# EAGLE board rizon-bckp (EAGLE 8.4.0)
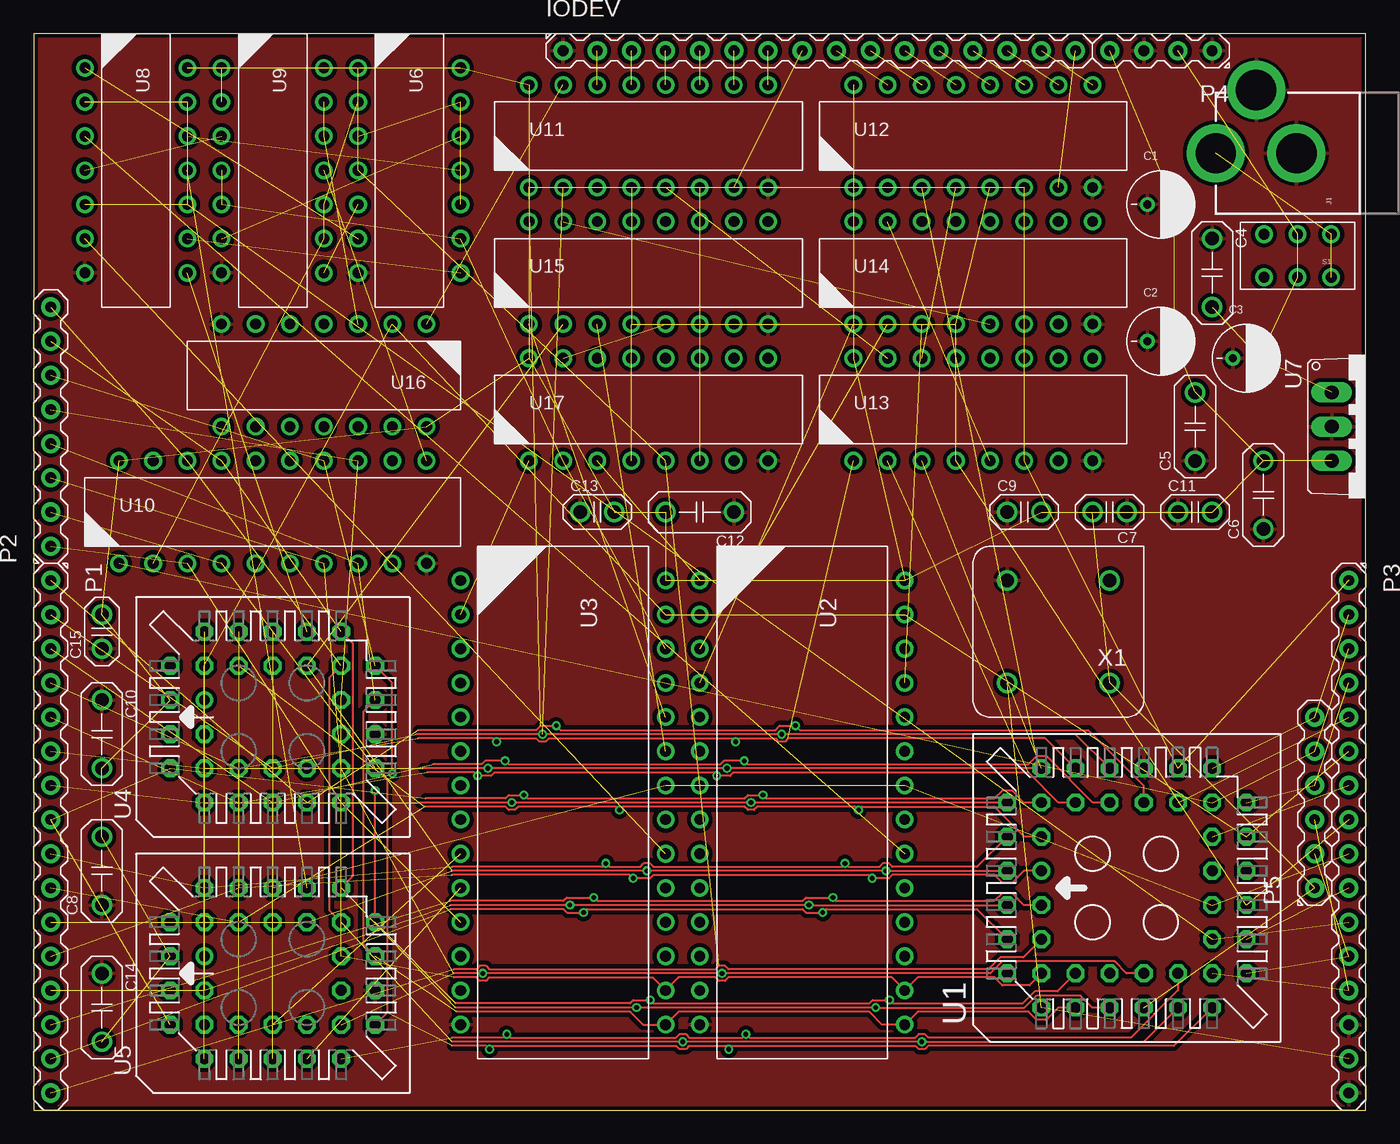
[diagram p0: board, top side]
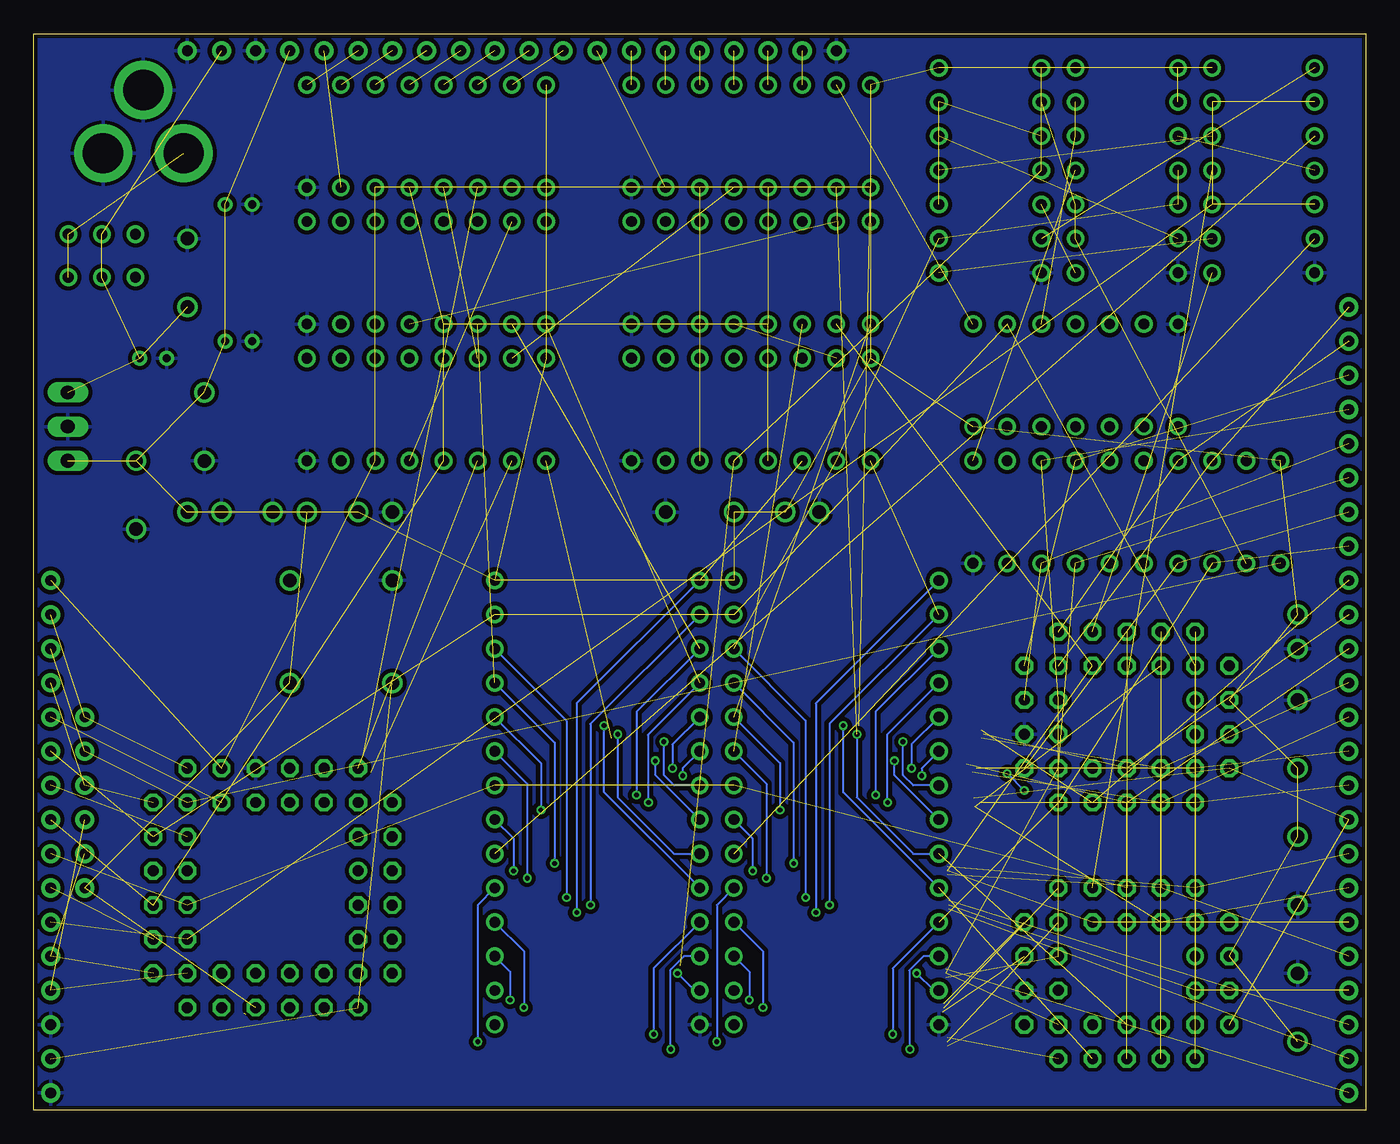
[diagram p1: board, bottom side, seen from below]

Size 99.06 x 80.01 mm. Coordinates in mm from the lower left corner, seen from the top.
Outline: 0,0 99.06,0 99.06,80.01 0,80.01 0,0
Copper layers (1*16): Top 0.035mm / dielectric 1.5mm / Bottom 0.035mm
Design rules "dooba": minimum track width 6mil, minimum drill 12mil, track to track 6mil, track to pad 6mil, pad to pad 6mil, via to via 6mil, smd to smd 0mil, copper to edge 10mil, drill to drill 10mil, minimum pad ring 10mil, minimum via ring 6mil, stop-mask expansion 2mil, vias tented up to drill 25mil, thermal gap 10mil

## Footprints (pad centres in the part's own frame; a part is rotated, then mirrored left to right if it is on the bottom)
PIN_16 = drill 0.8 pad 1.422: 1 -19.05,0; 2 -16.51,0; 3 -13.97,0; 4 -11.43,0; 5 -8.89,0; 6 -6.35,0; 7 -3.81,0; 8 -1.27,0; 9 1.27,0; 10 3.81,0; 11 6.35,0; 12 8.89,0; 13 11.43,0; 14 13.97,0; 15 16.51,0; 16 19.05,0
RADCAP_5MM = drill 0.6: + 1,0; - -1,0
CAP_508 = drill 1: P$1 -2.54,0; P$2 2.54,0
CAP_DISC = drill 1: P$1 -1.27,0; P$2 1.27,0
PWRJACK_5521 = drill 2.997 pad 4.318: GND 0,0.08; GNDBREAK 4.7,3.08; PWR 0,6.08
PIN_8 = drill 0.8 pad 1.422: 1 -8.89,0; 2 -6.35,0; 3 -3.81,0; 4 -1.27,0; 5 1.27,0; 6 3.81,0; 7 6.35,0; 8 8.89,0
PIN_4 = drill 0.8 pad 1.422: 1 -3.81,0; 2 -1.27,0; 3 1.27,0; 4 3.81,0
PIN_6 = drill 0.8 pad 1.422: 1 -6.35,0; 2 -3.81,0; 3 -1.27,0; 4 1.27,0; 5 3.81,0; 6 6.35,0
EG1271 = drill 0.8: 1 -2.5,1.6; 2 0,1.6; 3 2.5,1.6; 4 -2.5,-1.6; 5 0,-1.6; 6 2.5,-1.6
PLCC-S44-SOCKET = drill 0.813: 1 1.27,6.35 | drill 0.813 octagon: 2 -1.27,8.89; 3 -1.27,6.35; 4 -3.81,8.89; 5 -3.81,6.35; 6 -6.35,8.89; 7 -8.89,6.35; 8 -6.35,6.35; 9 -8.89,3.81; 10 -6.35,3.81; 11 -8.89,1.27; 12 -6.35,1.27; 13 -8.89,-1.27; 14 -6.35,-1.27; 15 -8.89,-3.81; 16 -6.35,-3.81; 17 -8.89,-6.35; 18 -6.35,-8.89; 19 -6.35,-6.35; 20 -3.81,-8.89; 21 -3.81,-6.35; 22 -1.27,-8.89; 23 -1.27,-6.35; 24 1.27,-8.89; 25 1.27,-6.35; 26 3.81,-8.89; 27 3.81,-6.35; 28 6.35,-8.89; 29 8.89,-6.35; 30 6.35,-6.35; 31 8.89,-3.81; 32 6.35,-3.81; 33 8.89,-1.27; 34 6.35,-1.27; 35 8.89,1.27; 36 6.35,1.27; 37 8.89,3.81; 38 6.35,3.81; 39 8.89,6.35; 40 6.35,8.89; 41 6.35,6.35; 42 3.81,8.89; 43 3.81,6.35; 44 1.27,8.89
PDIP28-600 = drill 0.8: P$1 -16.51,-7.62; P$2 -13.97,-7.62; P$3 -11.43,-7.62; P$4 -8.89,-7.62; P$5 -6.35,-7.62; P$6 -3.81,-7.62; P$7 -1.27,-7.62; P$8 1.27,-7.62; P$9 3.81,-7.62; P$10 6.35,-7.62; P$11 8.89,-7.62; P$12 11.43,-7.62; P$13 13.97,-7.62; P$14 16.51,-7.62; P$15 16.51,7.62; P$16 13.97,7.62; P$17 11.43,7.62; P$18 8.89,7.62; P$19 6.35,7.62; P$20 3.81,7.62; P$21 1.27,7.62; P$22 -1.27,7.62; P$23 -3.81,7.62; P$24 -6.35,7.62; P$25 -8.89,7.62; P$26 -11.43,7.62; P$27 -13.97,7.62; P$28 -16.51,7.62
PLCC-S32--SOCKET = drill 0.813: 1 1.27,5.08 | drill 0.813 octagon: 2 -1.27,7.62; 3 -1.27,5.08; 4 -3.81,7.62; 5 -6.35,5.08; 6 -3.81,5.08; 7 -6.35,2.54; 8 -3.81,2.54; 9 -6.35,0; 10 -3.81,0; 11 -6.35,-2.54; 12 -3.81,-2.54; 13 -6.35,-5.08; 14 -3.81,-7.62; 15 -3.81,-5.08; 16 -1.27,-7.62; 17 -1.27,-5.08; 18 1.27,-7.62; 19 1.27,-5.08; 20 3.81,-7.62; 21 6.35,-5.08; 22 3.81,-5.08; 23 6.35,-2.54; 24 3.81,-2.54; 25 6.35,0; 26 3.81,0; 27 6.35,2.54; 28 3.81,2.54; 29 6.35,5.08; 30 3.81,7.62; 31 3.81,5.08; 32 1.27,7.62
PDIP14 = drill 0.8: P$1 -7.62,-3.81; P$2 -5.08,-3.81; P$3 -2.54,-3.81; P$4 0,-3.81; P$5 2.54,-3.81; P$6 5.08,-3.81; P$7 7.62,-3.81; P$8 7.62,3.81; P$9 5.08,3.81; P$10 2.54,3.81; P$11 0,3.81; P$12 -2.54,3.81; P$13 -5.08,3.81; P$14 -7.62,3.81
TO220V = drill 1.016 long: 1 -2.54,-2.54; 2 0,-2.54; 3 2.54,-2.54
PDIP20 = drill 0.8: P$1 -11.43,-3.81; P$2 -8.89,-3.81; P$3 -6.35,-3.81; P$4 -3.81,-3.81; P$5 -1.27,-3.81; P$6 1.27,-3.81; P$7 3.81,-3.81; P$8 6.35,-3.81; P$9 8.89,-3.81; P$10 11.43,-3.81; P$11 11.43,3.81; P$12 8.89,3.81; P$13 6.35,3.81; P$14 3.81,3.81; P$15 1.27,3.81; P$16 -1.27,3.81; P$17 -3.81,3.81; P$18 -6.35,3.81; P$19 -8.89,3.81; P$20 -11.43,3.81
PDIP16 = drill 0.8: P$1 -8.89,-3.81; P$2 -6.35,-3.81; P$3 -3.81,-3.81; P$4 -1.27,-3.81; P$5 1.27,-3.81; P$6 3.81,-3.81; P$7 6.35,-3.81; P$8 8.89,-3.81; P$9 8.89,3.81; P$10 6.35,3.81; P$11 3.81,3.81; P$12 1.27,3.81; P$13 -1.27,3.81; P$14 -3.81,3.81; P$15 -6.35,3.81; P$16 -8.89,3.81
OSC127 = drill 1: 1 -3.81,-3.81; 4 3.81,-3.81; 5 3.81,3.81; 8 -3.81,3.81

## Placement (x,y rotation side)
!IODEV  ADDR  [PIN_16]  58.42,78.74 0 top
C1  100uF  [RADCAP_5MM]  83.82,67.31 0 top
C2  10uF  [RADCAP_5MM]  83.82,57.15 0 top
C3  100uF  [RADCAP_5MM]  90.17,55.88 0 top
C4  1uF  [CAP_508]  87.63,62.23 270 top
C5  1uF  [CAP_508]  86.36,50.8 90 top
C6  1uF  [CAP_508]  91.44,45.72 90 top
C7  100nF  [CAP_DISC]  80.01,44.45 180 top
C8  1uF  [CAP_508]  5.08,17.78 90 top
C9  100nF  [CAP_DISC]  73.66,44.45 0 top
C10  1uF  [CAP_508]  5.08,27.94 270 top
C11  100nF  [CAP_DISC]  86.36,44.45 0 top
C12  1uF  [CAP_508]  49.53,44.45 180 top
C13  100nF  [CAP_DISC]  41.91,44.45 0 top
C14  1uF  [CAP_508]  5.08,7.62 270 top
C15  100nF  [CAP_DISC]  5.08,35.56 90 top
J1  PWRJACK5521  [PWRJACK_5521]  93.98,71.12 90 top
P1  ADDR  [PIN_16]  1.27,20.32 270 top
P2  DATA  [PIN_8]  1.27,50.8 90 top
P3  CTL  [PIN_16]  97.79,20.32 270 top
P4  PWR  [PIN_4]  83.82,78.74 180 top
P5  10k  [PIN_6]  95.25,22.86 90 top
S1  SWITCH_SPDT2EG1271  [EG1271]  93.98,63.5 180 top
U1  Z8400  [PLCC-S44-SOCKET]  81.28,16.51 90 top
U2  AS6C62256PDIP  [PDIP28-600]  57.15,22.86 270 top
U3  AS6C62256PDIP  [PDIP28-600]  39.37,22.86 270 top
U4  AT28C64BPLCC  [PLCC-S32--SOCKET]  17.78,29.21 90 top
U5  AT28C64BPLCC  [PLCC-S32--SOCKET]  17.78,10.16 90 top
U6  7432PDIP  [PDIP14]  27.94,69.85 270 top
U7  7805TO220  [TO220V]  99.06,50.8 270 top
U8  7432PDIP  [PDIP14]  7.62,69.85 270 top
U9  7400PDIP  [PDIP14]  17.78,69.85 270 top
U10  74273PDIP  [PDIP20]  17.78,44.45 0 top
U11  74138PDIP  [PDIP16]  45.72,72.39 0 top
U12  74138PDIP  [PDIP16]  69.85,72.39 0 top
U13  74138PDIP  [PDIP16]  69.85,52.07 0 top
U14  74138PDIP  [PDIP16]  69.85,62.23 0 top
U15  74138PDIP  [PDIP16]  45.72,62.23 0 top
U16  7432PDIP  [PDIP14]  21.59,54.61 180 top
U17  74138PDIP  [PDIP16]  45.72,52.07 0 top
X1  OSC412.7  [OSC127]  76.2,35.56 180 top

## Library data of the parts
!IODEV C1-C15 J1 P1-P5 S1 U1-U17 X1 = dooba

## Nets
!BUSACK: P3.7 U1.27
!BUSREQ: P3.2 P5.6 U1.29
!HALT: P3.10 U1.20
!HIGH_ADDR: U8.P$4 U9.P$3
!INT: P3.12 P5.2 U1.18
!IO_SELECT_BANK0: U11.P$5 U13.P$15
!IO_SELECT_BANK1: U12.P$4 U13.P$14
!IODEV0: U11.P$15 U16.P$1
!IODEV1: !IODEV.2 U11.P$14
!IODEV2: !IODEV.3 U11.P$13
!IODEV3: !IODEV.4 U11.P$12
!IODEV4: !IODEV.5 U11.P$11
!IODEV5: !IODEV.6 U11.P$10
!IODEV6: !IODEV.7 U11.P$9
!IODEV7: !IODEV.8 U11.P$7
!IODEV8: !IODEV.9 U12.P$15
!IODEV9: !IODEV.10 U12.P$14
!IODEV10: !IODEV.11 U12.P$13
!IODEV11: !IODEV.12 U12.P$12
!IODEV12: !IODEV.13 U12.P$11
!IODEV13: !IODEV.14 U12.P$10
!IODEV14: !IODEV.15 U12.P$9
!IODEV15: !IODEV.16 U12.P$7
!IORQ: P3.8 U1.22 U11.P$4 U12.P$5 U13.P$4 U14.P$4 U15.P$4 U17.P$4
!M1: P3.1 U1.31 U11.P$6 U12.P$6 U13.P$6 U14.P$6 U15.P$6 U17.P$6
!MEM_SELECT_LOWRAM: U6.P$6 U8.P$1
!MEM_SELECT_ROM: U6.P$3 U6.P$10 U6.P$13
!MEM_SELECT_ROM_BANK0: U6.P$8 U8.P$9
!MEM_SELECT_ROM_BANK1: U6.P$11 U8.P$12
!MREQ: P3.11 U1.21 U8.P$2 U8.P$5 U8.P$10 U8.P$13
!NMI: P3.13 P5.3 U1.19
!RAM_BANK0_CE: U2.P$20 U8.P$3
!RAM_BANK1_CE: U3.P$20 U8.P$6
!RD: P3.9 U1.23 U2.P$22 U3.P$22 U4.25 U5.25
!RESET: P3.3 P5.5 U1.30 U10.P$1
!RFSH: P3.5 U1.32
!ROM_BANK0_CE: U4.23 U8.P$8
!ROM_BANK1: U6.P$12 U9.P$6
!ROM_BANK1_CE: U5.23 U8.P$11
!SCR0_CP: U9.P$12 U9.P$13 U16.P$3
!SCR0_ROM_EN: U6.P$2 U9.P$9 U9.P$10 U10.P$2
!WAIT: P3.4 P5.4 U1.28
!WR: P3.6 U1.26 U2.P$27 U3.P$27 U4.31 U5.31 U16.P$2
ADDR0: P1.1 U1.34 U2.P$10 U3.P$10 U4.11 U5.11 U11.P$1 U12.P$1
ADDR1: P1.2 U1.35 U2.P$9 U3.P$9 U4.10 U5.10 U11.P$2 U12.P$2
ADDR2: P1.3 U1.36 U2.P$8 U3.P$8 U4.9 U5.9 U11.P$3 U12.P$3
ADDR3: P1.4 U1.37 U2.P$7 U3.P$7 U4.8 U5.8 U13.P$1
ADDR4: P1.5 U1.38 U2.P$6 U3.P$6 U4.7 U5.7 U13.P$2
ADDR5: P1.6 U1.39 U2.P$5 U3.P$5 U4.6 U5.6 U13.P$3
ADDR6: P1.7 U1.40 U2.P$4 U3.P$4 U4.5 U5.5 U14.P$1
ADDR7: P1.8 U1.41 U2.P$3 U3.P$3 U4.4 U5.4 U14.P$2
ADDR8: P1.9 U1.42 U2.P$25 U3.P$25 U4.29 U5.29 U14.P$3
ADDR9: P1.10 U1.43 U2.P$24 U3.P$24 U4.28 U5.28 U15.P$1
ADDR10: P1.11 U1.44 U2.P$21 U3.P$21 U4.24 U5.24 U15.P$2
ADDR11: P1.12 U1.1 U2.P$23 U3.P$23 U4.27 U5.27 U15.P$3
ADDR12: P1.13 U1.2 U2.P$2 U3.P$2 U4.3 U5.3 U17.P$1
ADDR13: P1.14 U1.3 U2.P$26 U3.P$26 U6.P$9 U9.P$4 U9.P$5 U17.P$2
ADDR14: P1.15 U1.4 U2.P$1 U3.P$1 U17.P$3
ADDR15: P1.16 U1.5 U6.P$1 U6.P$4 U9.P$1 U9.P$2 U17.P$5
CLK: P3.15 U1.7 X1.5
DATA0: P2.1 U1.16 U2.P$11 U3.P$11 U4.13 U5.13 U10.P$3
DATA1: P2.2 U1.17 U2.P$12 U3.P$12 U4.14 U5.14 U10.P$4
DATA2: P2.3 U1.14 U2.P$13 U3.P$13 U4.15 U5.15 U10.P$7
DATA3: P2.4 U1.9 U2.P$15 U3.P$15 U4.18 U5.18 U10.P$8
DATA4: P2.5 U1.8 U2.P$16 U3.P$16 U4.19 U5.19 U10.P$13
DATA5: P2.6 U1.10 U2.P$17 U3.P$17 U4.20 U5.20 U10.P$14
DATA6: P2.7 U1.11 U2.P$18 U3.P$18 U4.21 U5.21 U10.P$17
DATA7: P2.8 U1.15 U2.P$19 U3.P$19 U4.22 U5.22 U10.P$18
GND: !IODEV.1 C1.- C2.- C3.- C4.P$1 C5.P$1 C6.P$1 C7.P$1 C8.P$1 C9.P$1 C10.P$1 C11.P$1 C12.P$1 C13.P$1 C14.P$1 C15.P$1 J1.GND J1.GNDBREAK P3.14 P3.16 P4.1 P4.3 U1.33 U2.P$14 U3.P$14 U4.16 U5.16 U6.P$7 U7.2 U8.P$7 U9.P$7 U10.P$10 U11.P$8 U12.P$8 U13.P$8 U14.P$8 U15.P$8 U16.P$7 U17.P$8 X1.4
N$1: U13.P$5 U14.P$15
N$2: U14.P$5 U15.P$15
N$3: U15.P$5 U17.P$15
N$4: J1.PWR S1.1 S1.4
SCR0_CP: U9.P$11 U10.P$11
SCR0_ROM_EN: U6.P$5 U9.P$8
VCC: C1.+ C2.+ C5.P$2 C6.P$2 C7.P$2 C8.P$2 C9.P$2 C10.P$2 C11.P$2 C12.P$2 C13.P$2 C14.P$2 C15.P$2 P4.4 P5.1 U1.13 U2.P$28 U3.P$28 U4.32 U5.32 U6.P$14 U7.3 U8.P$14 U9.P$14 U10.P$20 U11.P$16 U12.P$16 U13.P$16 U14.P$16 U15.P$16 U16.P$14 U17.P$16 X1.8
VIN: C3.+ C4.P$2 P4.2 S1.2 S1.5 U7.1

## Tracks (layer width: path | path; a pad name or v marks a point on that pad's centre or on a via)
!BUSACK  (1 unrouted)
!BUSREQ  (2 unrouted)
!HALT  (1 unrouted)
!HIGH_ADDR  (1 unrouted)
!INT  (2 unrouted)
!IO_SELECT_BANK0  (1 unrouted)
!IO_SELECT_BANK1  (1 unrouted)
!IODEV0  (1 unrouted)
!IODEV1  (1 unrouted)
!IODEV2  (1 unrouted)
!IODEV3  (1 unrouted)
!IODEV4  (1 unrouted)
!IODEV5  (1 unrouted)
!IODEV6  (1 unrouted)
!IODEV7  (1 unrouted)
!IODEV8  (1 unrouted)
!IODEV9  (1 unrouted)
!IODEV10  (1 unrouted)
!IODEV11  (1 unrouted)
!IODEV12  (1 unrouted)
!IODEV13  (1 unrouted)
!IODEV14  (1 unrouted)
!IODEV15  (1 unrouted)
!IORQ  (7 unrouted)
!M1  (7 unrouted)
!MEM_SELECT_LOWRAM  (1 unrouted)
!MEM_SELECT_ROM  (2 unrouted)
!MEM_SELECT_ROM_BANK0  (1 unrouted)
!MEM_SELECT_ROM_BANK1  (1 unrouted)
!MREQ  (5 unrouted)
!NMI  (2 unrouted)
!RAM_BANK0_CE  (1 unrouted)
!RAM_BANK1_CE  (1 unrouted)
!RD  (5 unrouted)
!RESET  (3 unrouted)
!RFSH  (1 unrouted)
!ROM_BANK0_CE  (1 unrouted)
!ROM_BANK1  (1 unrouted)
!ROM_BANK1_CE  (1 unrouted)
!SCR0_CP  (2 unrouted)
!SCR0_ROM_EN  (3 unrouted)
!WAIT  (2 unrouted)
!WR  (6 unrouted)
ADDR0  (via drill 0.35)  (5 unrouted)
  Top 0.152: U1.34 82.55,24.12 78.42,28.25 56.97,28.25 v56.64,28.57 55.48,28.57 55.14,28.25 39.19,28.25 v38.86,28.57 37.7,28.57 37.36,28.25 28.57,28.25
  Bottom 0.152: U2.P$10 56.64,23.62 v56.64,28.57 | U3.P$10 38.86,23.62 v38.86,28.57
ADDR1  (via drill 0.35)  (5 unrouted)
  Top 0.152: U1.35 77.47,27.94 v55.63,27.94 v37.85,27.94 28.45,27.94
  Bottom 0.152: U2.P$9 51.44,19.05 55.63,23.24 v55.63,27.94 | U3.P$9 33.66,19.05 37.85,23.24 v37.85,27.94
ADDR2  (via drill 0.35)  (5 unrouted)
  Top 0.152: U1.36 78.75,22.86 75.32,26.29 74.56,26.29 73.98,25.7 53.08,25.7 v52.83,25.96 51.33,25.96 51.08,25.7 35.3,25.7 v35.05,25.96 33.55,25.96 33.3,25.7 29.72,25.7
  Bottom 0.152: U2.P$8 52.83,24.89 v52.83,25.96 | U3.P$8 35.05,24.89 v35.05,25.96
ADDR3  (via drill 0.35)  (4 unrouted)
  Top 0.152: U1.37 75.23,27.64 56.11,27.64 55.86,27.38 55.4,27.38 55.14,27.64 52.45,27.64 v52.2,27.38 51.95,27.64 38.33,27.64 38.08,27.38 37.62,27.38 37.36,27.64 34.67,27.64 v34.42,27.38 34.17,27.64 28.57,27.64
  Bottom 0.152: U2.P$7 51.44,24.13 52.2,24.89 v52.2,27.38 | U3.P$7 33.66,24.13 34.42,24.89 v34.42,27.38
ADDR4  (via drill 0.35)  (4 unrouted)
  Top 0.152: U1.38 76.21,22.86 73.98,25.09 52.04,25.09 51.79,24.84 v50.8,24.84 50.55,25.09 34.26,25.09 34.01,24.84 v33.02,24.84 32.77,25.09 29.26,25.09
  Bottom 0.152: U2.P$6 50.8,25.4 v50.8,24.84 50.8,24.77 | U3.P$6 33.02,25.4 v33.02,24.84 33.02,24.77
ADDR5  (via drill 0.35)  (4 unrouted)
  Top 0.152: U1.39 v51.56,25.4 v33.78,25.4 28.96,25.4
  Bottom 0.152: U2.P$5 51.56,27.18 v51.56,25.4 | U3.P$5 33.78,27.18 v33.78,25.4
ADDR6  (via drill 0.35)  (4 unrouted)
  Top 0.152: U1.40 v53.34,22.86 v35.56,22.86 28.7,22.86
  Bottom 0.152: U2.P$4 53.39,27.89 53.39,22.91 v53.34,22.86 | U3.P$4 35.61,27.89 35.61,22.91 v35.56,22.86
ADDR7  (via drill 0.35)  (4 unrouted)
  Top 0.152: U1.41 73.65,22.86 72.76,23.75 72.02,23.75 71.44,23.16 54.48,23.16 v54.23,23.42 53.11,23.42 52.86,23.16 36.7,23.16 v36.45,23.42 35.33,23.42 35.08,23.16 29.13,23.16
  Bottom 0.152: v54.23,23.42 54.23,29.59 U2.P$3 | v36.45,23.42 36.45,29.59 U3.P$3
ADDR8  (via drill 0.35)  (4 unrouted)
  Top 0.152: U1.42 70.16,18.09 63.85,18.09 63.6,18.34 63.14,18.34 62.89,18.09 60.58,18.09 v60.33,18.34 60.33,18.29 60.12,18.09 46.08,18.09 45.82,18.34 45.36,18.34 45.11,18.09 42.8,18.09 v42.55,18.34 42.29,18.09 31.11,18.09
  Bottom 0.152: U2.P$25 60.33,27.3 v60.33,18.34 | U3.P$25 42.55,27.3 v42.55,18.34
ADDR9  (via drill 0.35)  (4 unrouted)
  Top 0.152: U1.43 73.67,20.32 71.44,22.55 61.59,22.55 v61.34,22.3 61.09,22.55 53.82,22.55 53.57,22.3 53.11,22.3 52.86,22.55 43.81,22.55 v43.56,22.3 43.31,22.55 36.04,22.55 35.79,22.3 35.33,22.3 35.08,22.55 29.08,22.55
  Bottom 0.152: U2.P$24 61.34,25.78 v61.34,22.3 61.34,22.23 | U3.P$24 43.56,25.78 v43.56,22.3 43.56,22.23
ADDR10  (via drill 0.35)  (4 unrouted)
  Top 0.152: U1.44 v63.37,17.78 v45.59,17.78 31.11,17.78
  Bottom 0.152: U2.P$21 63.37,20.19 v63.37,17.78 | U3.P$21 45.59,20.19 v45.59,17.78
ADDR11  (via drill 0.35)  (4 unrouted)
  Top 0.152: U1.1 73.65,17.78 72.76,16.89 72.02,16.89 71.44,17.48 63.85,17.48 63.6,17.22 v62.36,17.22 62.11,17.48 46.08,17.48 45.82,17.22 v44.58,17.22 44.33,17.48 31.11,17.48
  Bottom 0.152: U2.P$23 62.36,24.26 v62.36,17.22 62.36,17.14 | U3.P$23 44.58,24.26 v44.58,17.22 44.58,17.14
ADDR12  (via drill 0.35)  (4 unrouted)
  Top 0.152: U1.2 v57.66,15.24 v39.88,15.24 30.99,15.24
  Bottom 0.152: U2.P$2 57.66,28.7 v57.66,15.24 | U3.P$2 39.88,28.7 v39.88,15.24
ADDR13  (via drill 0.35)  (5 unrouted)
  Top 0.152: U1.3 73.65,15.24 72.76,16.13 72.02,16.13 71.44,15.54 59.69,15.54 v59.44,15.8 57.43,15.8 57.18,15.54 41.91,15.54 v41.66,15.8 39.65,15.8 39.4,15.54 30.99,15.54
  Bottom 0.152: U2.P$26 59.44,28.96 v59.44,15.8 | U3.P$26 41.66,28.96 v41.66,15.8
ADDR14  (via drill 0.35)  (2 unrouted)
  Top 0.152: U1.4 70.16,14.94 58.92,14.94 v58.67,14.68 57.43,14.68 57.18,14.94 41.15,14.94 v40.89,14.68 39.65,14.68 39.4,14.94 30.99,14.94
  Bottom 0.152: U2.P$1 58.67,30.23 v58.67,14.68 58.67,14.61 | U3.P$1 40.89,30.23 v40.89,14.68 40.89,14.61
ADDR15  (6 unrouted)
  Top 0.152: U1.5 73.58,11.35 71.9,11.35 71.01,10.46 51.66,10.46 51.41,10.72 50.95,10.72 50.7,10.46 33.88,10.46 33.63,10.72 33.17,10.72 32.92,10.46 31.24,10.46
CLK  (2 unrouted)
DATA0  (via drill 0.35)  (5 unrouted)
  Top 0.152: U1.16 85.09,8.89 83.31,7.11 | 83.44,7.24 81.58,5.38 66.52,5.38 66.27,5.64 65.81,5.64 65.56,5.38 53.21,5.38 v52.96,5.64 52.71,5.38 48.74,5.38 48.49,5.64 48.03,5.64 47.78,5.38 35.43,5.38 v35.18,5.64 34.93,5.38 31.11,5.38
  Bottom 0.152: U2.P$11 52.96,10.54 v52.96,5.64 | U3.P$11 35.18,10.54 v35.18,5.64
DATA1  (via drill 0.35)  (3 unrouted)
  Top 0.152: U1.17 84.78,4.78 66.52,4.78 66.27,4.52 65.81,4.52 65.56,4.78 51.94,4.78 v51.69,4.52 51.44,4.78 48.74,4.78 48.49,4.52 48.03,4.52 47.78,4.78 34.16,4.78 v33.91,4.52 33.66,4.78 31.11,4.78 | U4.14 26.29,24.51 26.29,7.24 U5.14
  Bottom 0.152: U2.P$12 50.7,11.43 51.74,10.39 51.74,4.57 v51.69,4.52 | U3.P$12 32.92,11.43 33.96,10.39 33.96,4.57 v33.91,4.52
DATA2  (via drill 0.35)  (4 unrouted)
  Top 0.152: U1.14 81.27,10.16 80.38,11.05 72.02,11.05 71.13,10.16 v51.18,10.16 v33.4,10.16 31.24,10.16
  Bottom 0.152: U2.P$13 49.91,8.89 v51.18,10.16 | U3.P$13 32.13,8.89 v33.4,10.16
DATA3  (3 unrouted)
  Top 0.152: U1.9 76.19,7.62 75.3,6.73 74.56,6.73 73.98,7.32 65.73,7.32 U2.P$15 63.09,6.35 62.13,7.32 47.95,7.32 U3.P$15 45.31,6.35 44.35,7.32 31.45,7.32 | U4.18 24.51,29.59 24.51,12.32 U5.18
DATA4  (4 unrouted)
  Top 0.152: U1.8 74.04,9.27 72.02,9.27 71.44,9.86 65.73,9.86 U2.P$16 63.8,9.86 51.66,9.86 51.41,9.6 50.95,9.6 50.7,9.86 47.95,9.86 U3.P$16 46.02,9.86 33.88,9.86 33.63,9.6 33.17,9.6 32.92,9.86 31.24,9.86
DATA5  (via drill 0.35)  (3 unrouted)
  Top 0.152: U1.10 76.12,8.81 74.44,8.81 73.55,7.92 63.88,7.92 v63.63,8.18 62.38,8.18 62.13,7.92 46.1,7.92 v45.85,8.18 44.6,8.18 44.35,7.92 31.37,7.92 | U5.20 v25.4,23.75 | v26.67,25.02 26.67,31.75 U4.20
  Bottom 0.152: U2.P$17 63.63,10.29 v63.63,8.18 | U3.P$17 45.85,10.29 v45.85,8.18 | v25.4,23.75 v26.67,25.02
DATA6  (via drill 0.35)  (3 unrouted)
  Top 0.152: U1.11 78.73,7.62 77.84,8.51 74.56,8.51 73.67,7.62 v62.61,7.62 v44.83,7.62 31.37,7.62 | U5.21 23.75,17.4 23.75,34.67 U4.21
  Bottom 0.152: U2.P$18 62.61,11.81 v62.61,7.62 | U3.P$18 44.83,11.81 v44.83,7.62
DATA7  (via drill 0.35)  (3 unrouted)
  Top 0.152: U1.15 82.55,5.08 v66.04,5.08 v48.26,5.08 31.11,5.08 | U4.22 21.97,32.13 21.97,14.86 U5.22
  Bottom 0.152: U2.P$19 66.04,15.24 v66.04,5.08 | U3.P$19 48.26,15.24 v48.26,5.08
GND
  pour Top (isolate 0.305): 0,80.01 100.33,80.01 100.33,0 0,0
  pour Bottom (isolate 0.305): 0,80.01 100.33,80.01 100.33,0 0,0
N$1  (1 unrouted)
N$2  (1 unrouted)
N$3  (1 unrouted)
N$4  (2 unrouted)
SCR0_CP  (1 unrouted)
SCR0_ROM_EN  (1 unrouted)
VCC  (32 unrouted)
VIN  (5 unrouted)